# Altium PCB PCB1.PcbDoc (part 2 of 2)
Units mm, origin at the board's own origin, x right, y up, seen from the top; angles counter-clockwise.
Board outline 99.95 x 91.57 mm, 2 copper layers (Top Layer, Bottom Layer); 184 components, 220 nets, 819 pads, 143 vias.
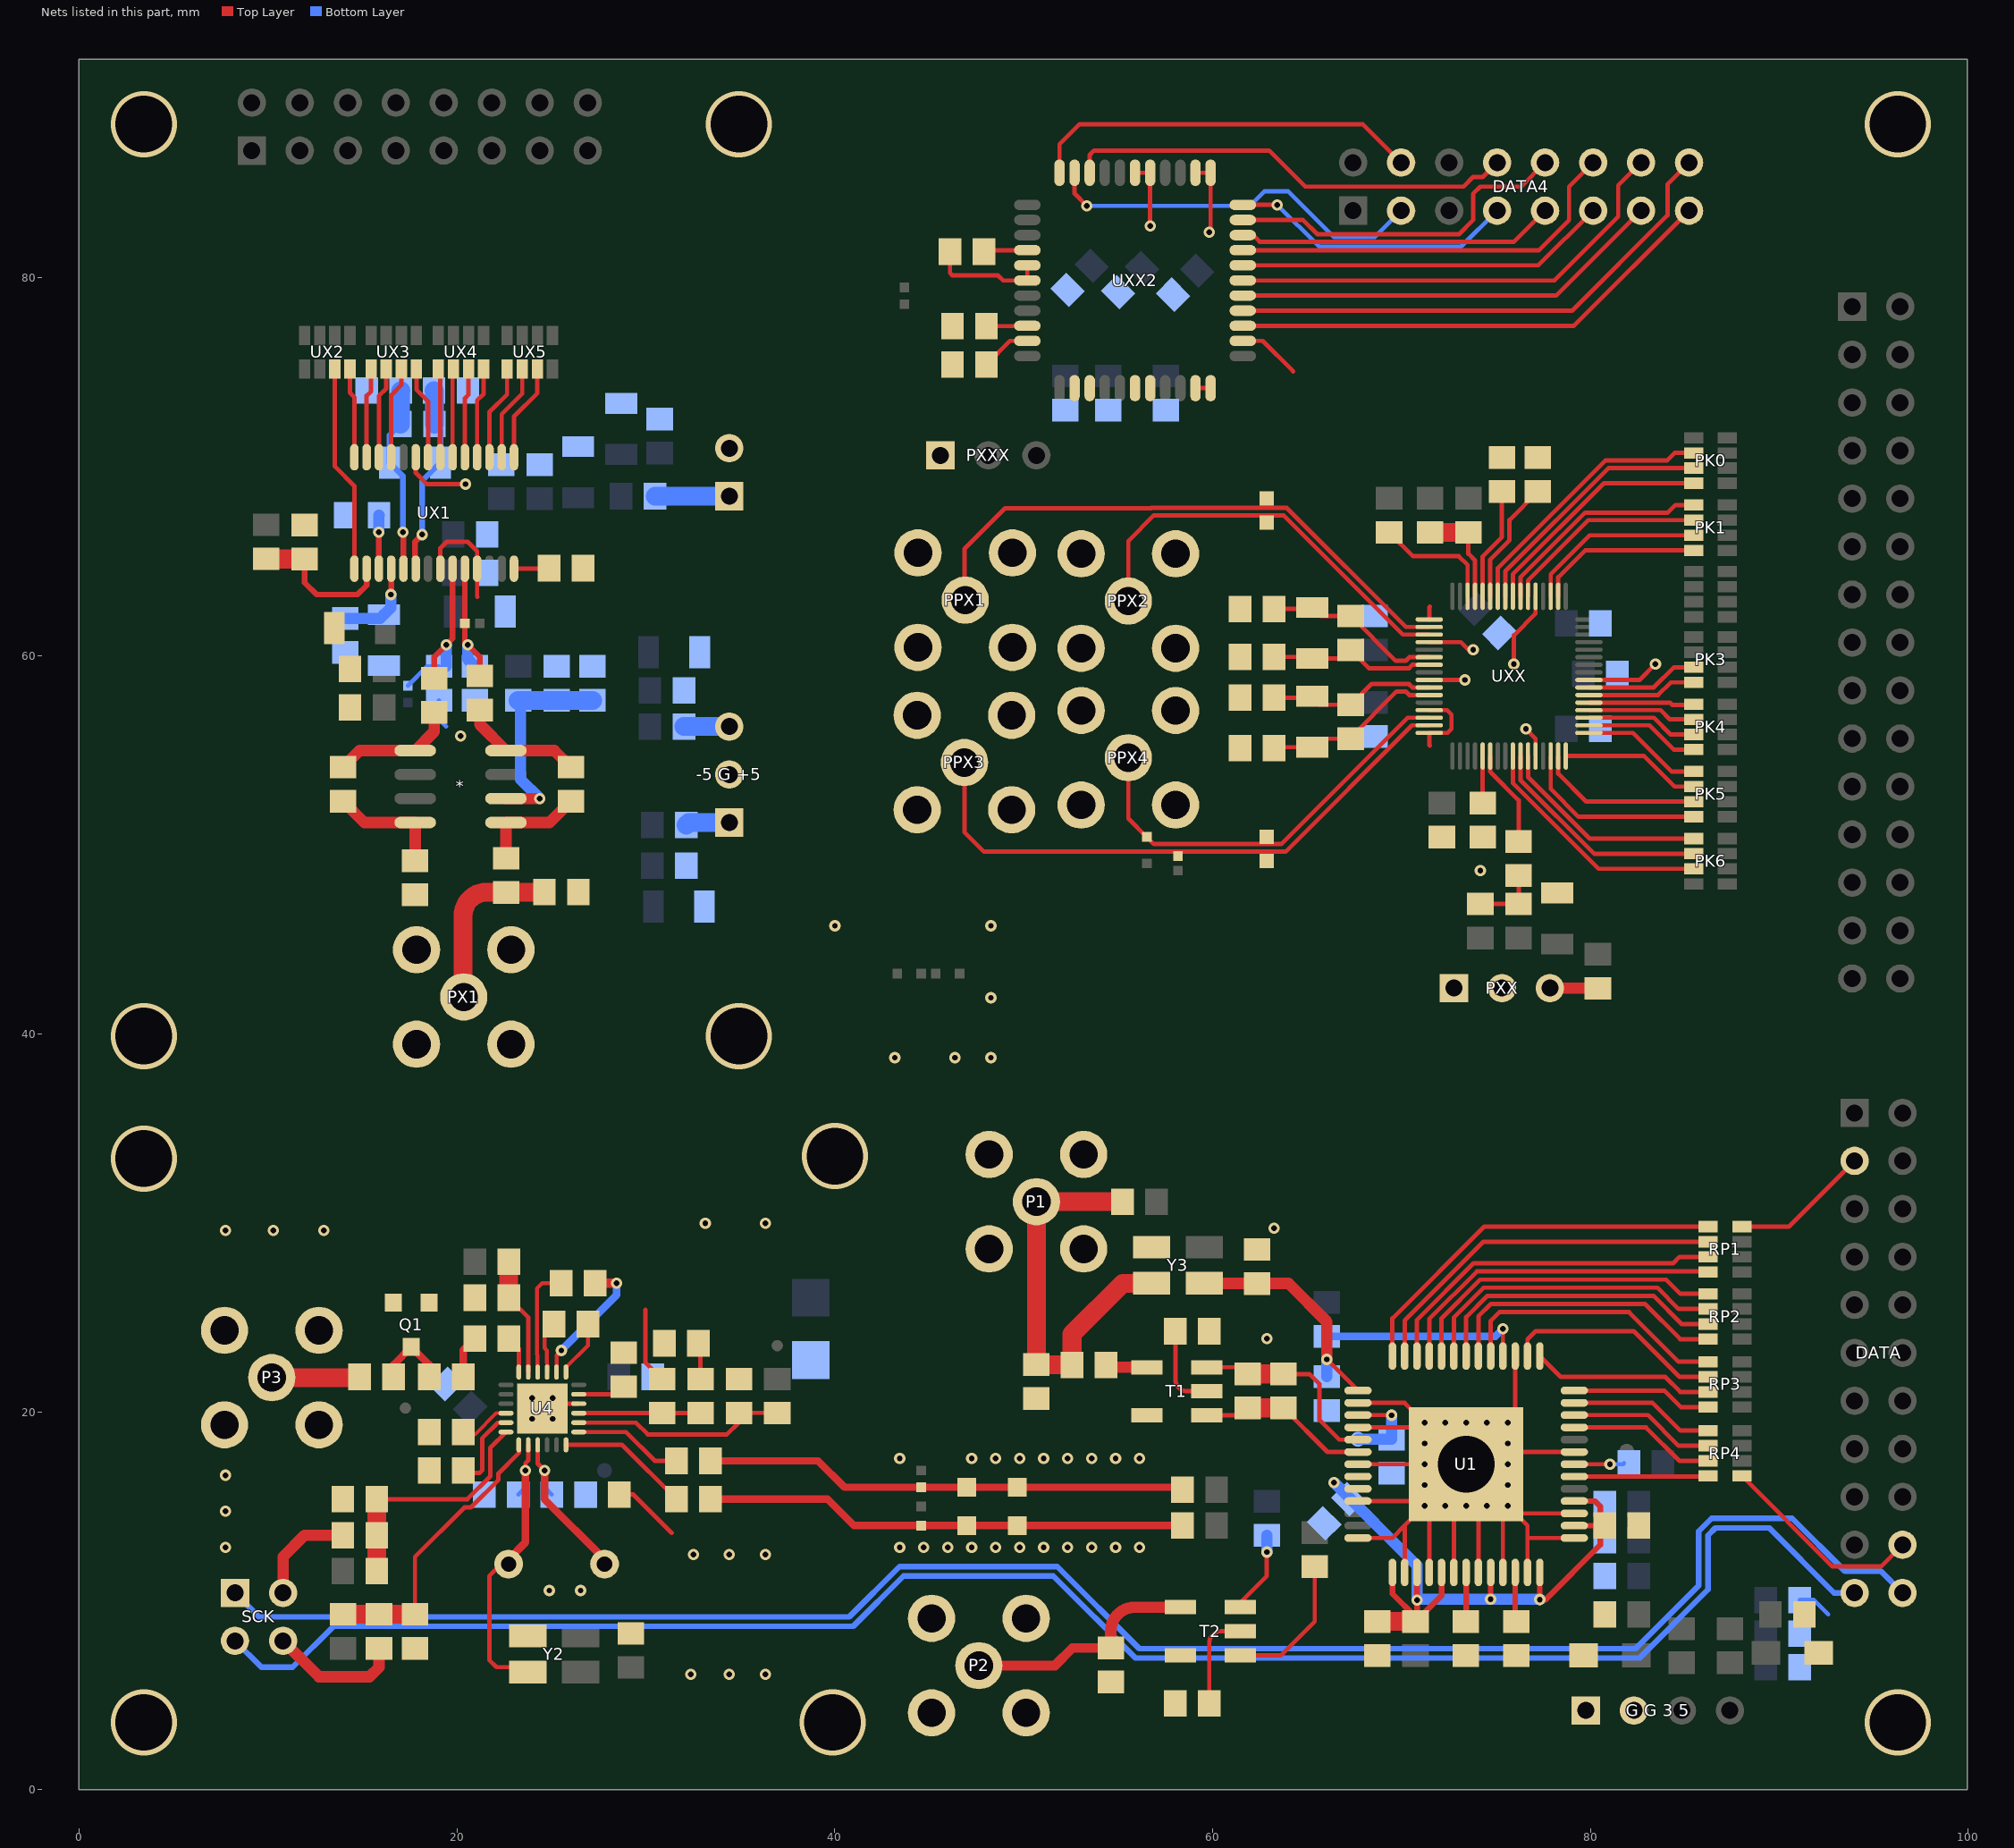
[diagram p2: the nets of this part, all layers, seen from the top]

## Via types
v1: diameter 0.6, hole 0.3, Top Layer to Bottom Layer, 111 vias
v2: diameter 0.5, hole 0.3, Top Layer to Bottom Layer, 20 vias
v3: diameter 3.5, hole 3, Top Layer to Bottom Layer, 11 vias
v4: diameter 1, hole 0.4, Top Layer to Bottom Layer, 1 vias

## Nets (pads, with @x,y where several pads share a name; then routed paths per layer and width w, separated by ;. In a path a pad name is that pad's centre, name@x,y a point inside that pad or via, vN(x,y) a via of type N, cw(c..) or ccw(c..) an arc to the next point about the centre after c; other vN are vias at no path point) (continued)
DAXX6: PK1.7 UXX.50 | length 8.8
  Top Layer w0.229: UXX.50@78.292,63.153 78.293,63.154 78.293,64.162 79.714,65.583 PK1.7@85.471,65.583
DAXX7: PK1.5 UXX.51 | length 9.6
  Top Layer w0.229: UXX.51@77.892,63.153 77.893,63.154 77.893,64.326 79.95,66.383 PK1.5@85.471,66.383
DAXX8: PK1.3 UXX.54 | length 10.9
  Top Layer w0.229: UXX.54@76.692,63.153 76.693,63.154 76.693,63.993 79.883,67.183 PK1.3@85.471,67.183
DAXX9: PK1.1 UXX.55 | length 11.8
  Top Layer w0.229: UXX.55@76.293,63.153 76.293,64.157 79.718,67.582 84.092,67.582 84.493,67.983 PK1.1@85.471,67.983
DAXX10: PK0.7 UXX.56 | length 12.7
  Top Layer w0.229: UXX.56@75.892,63.153 75.893,63.154 75.893,64.321 80.711,69.139 PK0.7@85.471,69.139
DAXX11: PK0.5 UXX.57 | length 13.6
  Top Layer w0.229: UXX.57@75.492,63.153 75.493,63.154 75.493,64.485 80.947,69.939 PK0.5@85.471,69.939
DBXX0: PK6.5 UXX.25 | length 12.9
  Top Layer w0.229: UXX.25@75.892,54.703 75.893,54.702 75.893,53.266 80.429,48.73 PK6.5@85.471,48.73
DBXX1: PK6.3 UXX.26 | length 12.1
  Top Layer w0.229: UXX.26@76.292,54.703 76.293,54.702 76.293,53.43 80.193,49.53 PK6.3@85.471,49.53
DBXX2: PK6.1 UXX.27 | length 11.2
  Top Layer w0.229: UXX.27@76.692,54.703 76.693,54.702 76.693,53.594 79.957,50.33 PK6.1@85.471,50.33
DBXX3: PK5.7 UXX.30 | length 9.9
  Top Layer w0.229: UXX.30@77.892,54.703 77.893,54.702 77.893,52.958 79.365,51.486 PK5.7@85.471,51.486
DBXX4: PK5.5 UXX.31 | length 8.7
  Top Layer w0.229: UXX.31@78.292,54.703 78.293,54.702 78.293,53.768 79.775,52.286 PK5.5@85.471,52.286
DBXX5: PK5.3 UXX.32 | length 7.4
  Top Layer w0.229: UXX.32@78.692,54.703 82.838,54.703 84.455,53.086 PK5.3@85.471,53.086
DBXX6: PK5.1 UXX.33 | length 6.4
  Top Layer w0.229: UXX.33@79.917,55.928 82.248,55.928 84.29,53.886 PK5.1@85.471,53.886
DBXX7: PK4.7 UXX.34 | length 6.1
  Top Layer w0.229: UXX.34@79.917,56.328 83.118,56.328 84.404,55.042 PK4.7@85.471,55.042
DBXX8: PK4.5 UXX.35 | length 5.9
  Top Layer w0.229: UXX.35@79.917,56.728 83.353,56.728 84.239,55.842 PK4.5@85.471,55.842
DBXX9: PK4.3 UXX.36 | length 5.8
  Top Layer w0.229: UXX.36@79.917,57.128 83.715,57.128 84.201,56.642 PK4.3@85.471,56.642
DBXX10: PK4.1 UXX.37 | length 5.6
  Top Layer w0.229: UXX.37@79.917,57.528 84.204,57.528 84.328,57.404 85.433,57.404 PK4.1@85.471,57.442
DBXX11: PK3.7 UXX.38 | length 5.8
  Top Layer w0.229: UXX.38@79.917,57.928 83.582,57.928 84.252,58.598 PK3.7@85.471,58.598
DRY: DATA.3 RP1.2 | length 7.4
  Top Layer w0.23: RP1.2@88.011,29.794 90.5,29.794 DATA.3@93.98,33.274
DT0: DATA4.15 UXX2.25 | length 26.1
  Top Layer w0.229: UXX2.25@61.593,77.47 79.121,77.47 DATA4.15@85.217,83.566
DT1: DATA4.16 UXX2.26 | length 27.8
  Top Layer w0.229: UXX2.26@61.593,78.27 79.032,78.27 84.074,83.312 84.074,84.963 DATA4.16@85.217,86.106
DT2: DATA4.13 UXX2.27 | length 22.9
  Top Layer w0.229: UXX2.27@61.593,79.07 78.181,79.07 DATA4.13@82.677,83.566
DT3: DATA4.14 UXX2.28 | length 24.6
  Top Layer w0.229: UXX2.28@61.593,79.87 78.092,79.87 81.471,83.248 81.471,84.9 DATA4.14@82.677,86.106
DT4: DATA4.11 UXX2.29 | length 19.7
  Top Layer w0.229: UXX2.29@61.593,80.67 77.241,80.67 DATA4.11@80.137,83.566
DT5: DATA4.12 UXX2.30 | length 21.5
  Top Layer w0.229: UXX2.30@61.593,81.47 77.279,81.47 78.867,83.058 78.867,84.836 DATA4.12@80.137,86.106
DT6: DATA4.9 UXX2.31 | length 16.8
  Top Layer w0.229: UXX2.31@61.593,82.27 62.129,82.27 62.484,81.915 75.946,81.915 DATA4.9@77.597,83.566
DT7: DATA4.10 UXX2.32 | length 18.7
  Top Layer w0.229: UXX2.32@61.593,83.07 64.782,83.07 65.538,82.314 73.043,82.314 73.787,83.058 73.787,84.455 74.168,84.836 76.327,84.836 DATA4.10@77.597,86.106
DT8: DATA4.7 UXX2.33 | length 15.2
  Top Layer w0.229: UXX2.33@61.593,83.87 v1(63.423,83.87)
  Bottom Layer w0.229: v1(63.423,83.87) 65.632,81.661 73.152,81.661 DATA4.7@75.057,83.566
DT9: DATA4.8 UXX2.42 | length 23.9
  Top Layer w0.229: UXX2.42@53.493,85.57 53.493,86.513 53.721,86.741 62.992,86.741 64.897,84.836 73.279,84.836 73.787,85.344 74.295,85.344 DATA4.8@75.057,86.106
DT10: DATA4.3 UXX2.43 | length 20.5
  Top Layer w0.229: UXX2.43@52.693,85.57 52.693,84.467 v1(53.34,83.82)
  Bottom Layer w0.229: v1(53.34,83.82) 61.976,83.82 62.738,84.582 64.008,84.582 66.421,82.169 68.58,82.169 DATA4.3@69.977,83.566
DT11: DATA4.4 UXX2.44 | length 20.9
  Top Layer w0.229: UXX2.44@51.893,85.57 51.893,87.072 52.959,88.138 67.945,88.138 DATA4.4@69.977,86.106
DX0: UX1.15 UX5.5 | length 5.2
  Top Layer w0.23: UX1.15@23.021,70.514 23.021,72.678 24.257,73.914 UX5.5@24.257,75.184
DX1: UX1.16 UX5.3 | length 5.1
  Top Layer w0.23: UX1.16@22.371,70.514 22.371,72.79 23.457,73.876 UX5.3@23.457,75.184
DX2: UX1.17 UX5.1 | length 5.1
  Top Layer w0.23: UX1.17@21.721,70.514 21.721,72.902 22.657,73.838 UX5.1@22.657,75.184
DX3: UX1.18 UX4.7 | length 4.8
  Top Layer w0.23: UX1.18@21.071,70.514 21.071,73.522 21.412,73.863 UX4.7@21.412,75.184
DX4: UX1.19 UX4.5 | length 4.7
  Top Layer w0.23: UX1.19@20.421,70.514 20.421,73.634 20.612,73.825 UX4.5@20.612,75.184
DX5: UX1.20 UX4.3 | length 4.7
  Top Layer w0.23: UX1.20@19.771,70.514 19.771,75.143 UX4.3@19.812,75.184
DX6: UX1.21 UX4.1 | length 4.7
  Top Layer w0.23: UX4.1@19.012,75.184 19.121,75.075 UX1.21@19.121,70.514
DX7: UX1.22 UX3.7 | length 4.9
  Top Layer w0.23: UX3.7@17.856,75.184 17.856,74.092 18.471,73.477 UX1.22@18.471,70.514
DX8: UX1.25 UX3.5 | length 4.9
  Top Layer w0.23: UX1.25@16.521,70.514 16.521,73.798 17.056,74.333 UX3.5@17.056,75.184
DX9: UX1.26 UX3.3 | length 4.8
  Top Layer w0.23: UX1.26@15.871,70.514 15.871,73.756 16.256,74.141 UX3.3@16.256,75.184
DX10: UX1.27 UX3.1 | length 4.8
  Top Layer w0.23: UX1.27@15.221,70.514 15.221,73.768 15.456,74.003 UX3.1@15.456,75.184
DX11: UX1.28 UX2.7 | length 4.8
  Top Layer w0.23: UX2.7@14.338,75.184 14.338,73.927 14.571,73.694 UX1.28@14.571,70.514
GND: "3 G.2" "-5 G +5.2" "G G 3 5.1" "G G 3 5.2" C1.1 C2.1 C3.1 C4.1 C5.1 C6.1 C7.1 C8.1 C9.1 C10.1 C11.1 C12.1 C13.1 C14.2 C16.1 C17.2 C18.2 C19.2 C20.2 C21.2 C22.2 C23.2 C24.2 C27.2 C28.1 C29.1 C30.1 C31.1 C32.1 C33.1 C34.1 C35.1 C38.2 C39.2 C40.1 CC22.1 CC23.1 CC24.1 CC25.1 CX3.2 CX4.1 CX5.1 CX6.1 CX7.1 CX8.1 CX9.1 CX10.1 CX11.2 CX12.2 CX13.2 CX14.2 CX15.2 CX16.1 CX17.1 CX18.1 CX20.1 CX21.1 CX22.2 CX23.2 CX24.2 CX26.2 CX30.1 CX31.1 CX37.2 CX38.1 CX39.2 CX40.2 CX41.1 CX42.2 CX43.2 CX44.2 CX45.1 CX46.1 CX47.1 CX48.1 CX49.1 CX50.1 CX51.1 CX52.1 CX53.1 P1.2 P2.2 P3.2 pad.85 PPX1.2 PPX2.2 PPX3.2 PPX4.2 PX1.2 PXX.1 PXX.2 PXXX.1 Q1.1 Q1.2 R2.1 R5.1 RR11.2 RR12.1 RR13.2 RX1.1 RX2.2 RX3.1 RX5.1 RX7.1 RX10.1 RX13.2 T1.2 T2.2 U1.2 U1.4 U1.7 U1.10 U1.13 U1.15 U1.17 U1.19 U1.21 U1.23 U1.25 U1.27 U1.29 U1.34 U1.42 U1.53 U4.16 U4.25 UX1.8 UX1.11 UX1.23 UXX2.5 UXX2.6 UXX2.13 UXX2.14 UXX2.17 UXX2.18 UXX2.21 UXX2.22 UXX2.24 UXX2.34 UXX2.35 UXX2.38 UXX2.39 UXX.1 UXX.4 UXX.9 UXX.13 UXX.16 UXX.28 UXX.40 UXX.53 Y2.2 Y3.2 | length 134.5
  Top Layer w0.229: C27.2@28.586,15.621 29.337,15.621 31.369,13.589 ; 29.972,25.4 29.972,22.617 C21.2@30.861,21.728 ; CX47.1@46.103,81.394 46.101,81.392 46.101,80.264 46.228,80.137 48.641,80.137 48.908,79.87 UXX2.6@50.193,79.87 UXX2.5@50.193,80.67 ; UXX2.39@55.893,85.57 UXX2.38@56.693,85.57 v1(56.693,82.758) ; UXX2.21@59.093,74.17 UXX2.22@59.893,74.17 ; UXX2.35@59.093,85.57 UXX2.34@59.893,85.57 59.893,82.499 v1(59.817,82.423) ; UXX2.24@61.593,76.67 62.649,76.67 64.262,75.057 ; UXX.13@71.467,57.128 72.412,57.128 72.644,56.896 72.644,56.134 72.438,55.928 UXX.16@71.467,55.928 71.467,55.279 71.501,55.245 ; UXX.9@71.467,58.728 v1(73.352,58.728) ; UXX.4@71.467,60.728 73.13,60.728 73.533,60.325 v1(73.787,60.325) ; UXX.1@71.467,61.928 71.467,62.577 71.501,62.611 ; v1(75.946,59.563) 75.946,61.087 77.092,62.233 UXX.53@77.092,63.153 ; v1(76.581,56.134) 77.092,55.623 UXX.28@77.092,54.703 ; UXX.40@79.917,58.728 82.604,58.728 v1(83.439,59.563)
  Top Layer w0.23: UX1.23@17.821,70.514 17.821,69.682 18.415,69.088 v1(20.447,69.088) ; UX1.8@19.121,64.614 19.121,65.707 19.454,66.04 20.574,66.04 21.071,65.543 UX1.11@21.071,64.614 21.071,63.13 21.082,63.119 ; U4.25@24.523,20.173 24.773,20.423 U4.16@26.448,20.423 ; U1.13@67.691,13.32 69.516,13.32 70.166,13.97 ; U1.10@67.691,15.27 U1.53@71.466,15.27 ; U1.7@67.691,17.22 v2(71.216,17.22) v3(73.416,17.22) ; U1.4@67.691,19.17 U1.53@71.216,19.17 ; U1.2@67.691,20.47 70.166,20.47 v2(71.216,19.42) v3(73.416,17.22) ; U1.15@70.166,11.495 70.166,13.97 ; U1.53@71.388,15.192 v2(71.216,15.02) 70.166,13.97 ; U1.17@71.466,11.495 U1.53@71.466,15.27 ; U1.19@72.766,11.495 U1.53@72.766,16.57 ; U1.21@74.066,11.495 U1.53@74.066,16.57 ; CX42.2@74.168,46.874 CX43.2@76.2,46.874 RR12.1@76.2,48.376 ; U1.23@75.366,11.495 U1.53@75.366,15.02 ; U1.42@76.016,22.945 76.016,19.82 v2(75.616,19.42) U1.53@74.066,17.87 ; U1.25@76.666,11.495 76.666,13.335 ; U1.27@79.141,13.32 76.681,13.32 76.666,13.335 ; U1.29@79.141,14.62 U1.53@76.016,14.62 ; U1.34@79.141,17.87 U1.53@74.066,17.87 ; U1.53@71.466,15.27 U1.53@72.766,16.57 ; U1.53@72.766,16.57 v3(73.416,17.22) ; v3(73.416,17.22) U1.53@74.066,17.87 ; v3(73.416,17.22) U1.53@74.066,16.57 ; U1.53@74.066,16.57 v2(75.616,15.02) U1.53@76.016,14.62 ; U1.53@76.016,14.62 76.666,13.97 76.666,13.335
  Bottom Layer w0.229: CX18.1@19.05,57.647 19.05,56.642 19.431,56.261 ; C12.1@91.07,10.033 91.821,10.033 92.583,9.271
  other v1: 32.385,6.096 34.417,6.096 36.322,6.096 24.892,10.541 26.543,10.541 32.512,12.446 34.417,12.446 36.322,12.446 7.747,12.827 43.434,12.827 44.704,12.827 45.974,12.827 47.244,12.827 48.514,12.827 49.784,12.827 51.054,12.827 52.324,12.827 53.594,12.827 54.864,12.827 56.134,12.827 7.747,14.732 7.747,16.637 43.434,17.526 47.244,17.526 48.514,17.526 49.784,17.526 51.054,17.526 52.324,17.526 53.594,17.526 54.864,17.526 56.134,17.526 62.865,23.876 7.747,29.591 10.287,29.591 12.954,29.591 63.246,29.718 33.147,29.972 36.322,29.972 43.18,38.735 46.355,38.735 48.26,38.735 48.26,41.91 40.005,45.72 48.26,45.72 74.168,48.641 20.193,55.753
  other v2: 72.316,15.02 73.416,15.02 74.516,15.02 71.216,16.12 75.616,16.12 75.616,17.22 71.216,18.32 75.616,18.32 72.316,19.42 73.416,19.42 74.516,19.42 23.973,19.623 25.073,19.623 23.973,20.723 25.073,20.723
  other v3: 3.429,3.556 39.878,3.556 96.266,3.556 3.429,33.401 40.005,33.528 3.429,39.878 34.925,39.878 3.429,88.138 34.925,88.138 96.266,88.138
Net*_1: *.1 RX11.2 RX12.1 | length 5.8
  Top Layer w0.6: RX12.1@22.606,49.287 22.593,49.3 *.1@22.593,51.181 24.903,51.181 RX11.2@26.035,52.313
Net*_2: *.2 CX16.2 RX6.1 RX7.2 | length 11.3
  Top Layer w0.6: *.2@22.593,52.451 v1(24.384,52.451)
  Bottom Layer w0.6: RX6.1@23.357,57.647 23.357,53.478 v1(24.384,52.451)
  Bottom Layer w1: RX6.1@23.241,57.647 23.357,57.647 CX16.2@27.178,57.647
Net*_4: *.4 RX8.2 RX11.1 | length 6.5
  Top Layer w0.6: RX8.2@21.209,57.139 21.209,56.375 *.4@22.593,54.991 25.157,54.991 RX11.1@26.035,54.113
Net*_5: *.5 RR10.1 RX9.2 | length 6.6
  Top Layer w0.6: RR10.1@13.97,54.113 14.848,54.991 *.5@17.793,54.991 18.796,55.994 RX9.2@18.796,57.012
Net*_8: *.8 RR10.2 RR13.1 | length 6.3
  Top Layer w0.6: RR10.2@13.97,52.313 15.102,51.181 *.8@17.793,51.181 17.793,49.173 RR13.1@17.78,49.16
NetC1_2: C1.2 U1.20 | length 2.6
  Top Layer w0.3: C1.2@73.406,8.901 73.416,8.911 U1.20@73.416,11.495
NetC2_2: C2.2 U1.24 | length 2.6
  Top Layer w0.3: U1.24@76.016,11.495 76.016,8.958 C2.2@76.073,8.901
NetC13_2: C13.2 T1.4 | length 4.6
  Top Layer w0.229: C13.2@58.028,24.257 58.028,21.717 ccw(c58.663,21.717) 58.663,21.082 T1.4@59.695,21.082
NetC15_1: C15.1 T1.1 | length 2.2
  Top Layer w0.61: C15.1@54.356,22.479 54.483,22.352 T1.1@56.515,22.352
NetC15_2: C15.2 P1.1 R2.2 Rx.1 Y3.3 | length 22
  Top Layer w1: Rx.1@55.234,31.115 P1.1@50.673,31.115 R2.2@50.673,22.49 50.684,22.479 C15.2@52.556,22.479 52.556,24.108 55.245,26.797 Y3.3@56.769,26.797
NetC16_2: C16.2 T2.4 | length 5.2
  Top Layer w0.229: C16.2@59.828,4.572 59.817,4.583 59.817,7.747 cw(c60.452,7.747) 60.452,8.382
  Top Layer w0.23: 60.452,8.382 T2.4@61.473,8.382
NetC17_1: C17.1 C38.1 C39.1 F4.2 U1.8 U1.9 U1.14 U1.16 U1.18 U1.22 U1.26 U1.28 U1.30 | length 37.5
  Top Layer w0.3: U1.14@69.516,11.495 69.516,10.367 70.739,9.144 F4.2@70.739,8.901 F4.2@70.816,8.978 ; U1.16@70.816,11.495 v1(70.816,10.033) F4.2@70.816,8.978 ; U1.18@72.116,11.495 72.116,10.278 F4.2@70.816,8.978 ; v1(74.716,10.073) U1.22@74.716,11.495 ; U1.26@77.316,11.495 v1(77.316,10.06) 77.624,10.06 80.518,12.954 C39.1@80.518,13.97 ; U1.28@79.141,13.97 C39.1@80.518,13.97 ; U1.30@79.141,15.27 80.234,15.27 80.518,14.986 C39.1@80.518,13.97
  Top Layer w1: C17.1@68.707,8.901 F4.2@70.739,8.901
  Bottom Layer w0.6: v1(66.421,16.256) 70.816,11.861 v1(70.816,10.033) 70.856,10.073 v1(74.716,10.073) 77.303,10.073 v1(77.316,10.06)
NetC18_1: C18.1 C40.2 F3.1 U1.1 U1.43 Y3.4 | length 24.9
  Top Layer w0.23: v1(66.04,22.771) U1.1@67.691,21.12 ; U1.43@75.366,22.945 v1(75.366,24.384) v1@75.366,24.566
  Top Layer w0.61: Y3.4@59.563,26.797 62.346,26.797 C40.2@62.357,26.786 64.019,26.786 66.04,24.765 v1(66.04,22.771)
  Bottom Layer w0.4: v1(66.04,22.771) F3.1@66.04,23.992 74.974,23.992 v1(75.366,24.384)
  Bottom Layer w0.6: C18.1@66.04,21.855 v1(66.04,22.771)
NetC20_1: C20.1 U4.17 | length 2.5
  Top Layer w0.23: U4.17@26.448,20.923 28.427,20.923 C20.1@28.829,21.325
NetC21_1: C21.1 R7.1 U4.15 | length 6.4
  Top Layer w0.23: U4.15@26.448,19.923 30.856,19.923 C21.1@30.861,19.928 R7.1@32.893,19.928
NetC22_1: C22.1 R7.2 | length 1.9
  Top Layer w0.23: C22.1@32.777,23.622 32.893,23.506 R7.2@32.893,21.728
NetC23_1: C23.1 R6.1 U4.14 | length 11.5
  Top Layer w0.23: U4.14@26.448,19.423 29.472,19.423 30.099,18.796 34.29,18.796 34.925,19.431 C23.1@34.925,19.928 ; C23.1@34.925,19.939 R6.1@36.957,19.939
NetC24_1: C24.1 F6.2 U4.23 | length 6.3
  Top Layer w0.23: C24.1@22.744,26.035 23.773,25.006 U4.23@23.773,22.098
  Top Layer w1: C24.1@22.744,26.035 F6.2@22.744,27.94
NetC25_1: C25.1 P3.1 | length 4.7
  Top Layer w1: P3.1@10.2,21.804 14.808,21.804 C25.1@14.848,21.844
NetC25_2: C25.2 C26.1 Q1.3 | length 4
  Top Layer w0.4: C25.2@16.648,21.844 16.648,22.492 Q1.3@17.587,23.431 18.531,22.487 C26.1@18.531,21.844
NetC26_2: C26.2 L3.1 | length 2.3
  Top Layer w0.4: C26.2@20.331,21.844 20.331,23.263 L3.1@20.944,23.876
NetC29_2: C29.2 U4.4 | length 2.7
  Top Layer w0.2: C29.2@20.331,18.796 20.955,18.796 22.082,19.923 U4.4@22.598,19.923
NetC30_2: C30.2 U4.5 | length 4.4
  Top Layer w0.23: C30.2@20.331,16.764 21.209,16.764 21.336,16.891 21.336,18.59 22.169,19.423 U4.5@22.598,19.423
NetC31_2: C31.2 R10.1 R12.1 U4.6 | length 13
  Top Layer w0.23: C31.2@15.759,15.367 20.552,15.367 21.766,16.581 21.766,18.091 U4.6@22.598,18.923
  Top Layer w1: R10.1@15.759,11.557 C31.2@15.759,15.367
NetC32_2: C32.2 R11.1 R13.1 U4.7 | length 15.2
  Top Layer w0.23: C32.2@17.78,9.282 17.78,12.319 20.398,14.937 20.731,14.937 22.196,16.402 22.196,16.735 23.273,17.812 U4.7@23.273,18.248
  Top Layer w1: R11.1@13.97,9.282 C32.2@17.78,9.282
NetC33_2: C33.2 U4.8 Y1.2 Y2.3 | length 16
  Top Layer w0.23: Y1.2@22.733,12.319 21.717,11.303 21.717,6.858 22.098,6.477 Y2.3@23.749,6.477 ; v1(23.622,16.891) 23.622,17.272 23.773,17.423 U4.8@23.773,18.248
  Top Layer w0.4: Y1.2@22.733,12.192 23.622,13.081 v1(23.622,16.891)
  Bottom Layer w0.23: C33.2@23.252,15.621 23.622,15.991 v1(23.622,16.891)
NetC34_2: C34.2 U4.9 Y1.1 | length 9
  Top Layer w0.23: U4.9@24.273,18.248 24.273,17.256 v1(24.638,16.891)
  Top Layer w0.4: v1(24.638,16.891) 24.638,15.367 Y1.1@27.813,12.192
  Bottom Layer w0.23: v1(24.638,16.891) 24.638,16.002 C34.2@25.019,15.621
NetC36_2: C36.2 pad.7@46.99,16.002 pad.7@49.657,16.002 pad.31 R8.2 | length 25.6
  Top Layer w0.4: R8.2@33.412,17.399 39.116,17.399 40.513,16.002 58.282,16.002 C36.2@58.409,15.875
NetC37_2: C37.2 pad.7@46.99,13.97 pad.8 pad.32 R9.2 | length 25.6
  Top Layer w0.4: R9.2@33.412,15.367 39.624,15.367 41.021,13.97 C37.2@58.409,13.97
NetCX1_1: CX1.1 CX2.1 CX4.2 UX1.6 | length 10.1
  Top Layer w0.3: UX1.6@17.821,64.614 17.78,64.655 17.78,66.04 v1(18.161,66.421)
  Bottom Layer w0.3: v1(18.161,66.421) 18.161,69.262 CX1.1@19.13,70.231 19.13,71.94 CX2.1@18.807,72.263
  Bottom Layer w1: CX4.2@18.785,74.041 18.807,74.019 CX2.1@18.807,72.263
NetCX1_2: CX1.2 CX2.2 CX3.1 UX1.5 | length 9.9
  Top Layer w0.3: UX1.5@17.171,64.614 v1@17.171,66.522
  Bottom Layer w0.3: CX2.2@17.007,72.263 16.43,71.686 CX1.2@16.43,70.231 17.145,69.516 v1(17.145,66.548)
  Bottom Layer w1: CX2.2@17.007,72.263 17.007,74.019 CX3.1@17.029,74.041
NetCX14_1: CX14.1 CX15.1 UX1.4 | length 4.7
  Top Layer w0.3: v1(16.51,63.246) 16.521,63.257 UX1.4@16.521,64.614
  Bottom Layer w0.6: CX14.1@14.097,61.987 15.933,61.987 CX15.1@16.129,62.183 16.51,62.564 v1(16.51,63.246)
NetCX17_2: CX17.2 pad.37 RX8.1 UX1.10 | length 7.4
  Top Layer w0.3: UX1.10@20.421,64.614 pad.37@20.421,61.722 20.421,60.732 v1(20.574,60.579) 21.209,59.944 RX8.1@21.209,58.939 RX8.1@21.209,58.812
  Bottom Layer w0.6: v1(20.574,60.579) 20.574,59.828 CX17.2@20.955,59.447
NetCX18_2: CX18.2 pad.38 RX9.1 UX1.9 | length 9.4
  Top Layer w0.3: RX9.1@18.796,58.812 18.796,59.944 v1(19.431,60.579) 19.771,60.919 UX1.9@19.771,64.614
  Bottom Layer w0.229: pad.38@17.399,58.42 18.426,59.447 CX18.2@19.05,59.447
  Bottom Layer w0.6: CX18.2@19.431,59.447 v1(19.431,60.579)
NetCX24_1: CX24.1 CX25.2 CX27.2 UXX.7 | length 8.9
  Top Layer w0.229: CX24.1@63.257,59.944 65.198,59.944 CX27.2@65.278,59.864 66.86,59.864 CX25.2@67.31,60.314 68.282,59.342 70.384,59.342 70.571,59.528 UXX.7@71.467,59.528
NetCX25_1: CX25.1 CX26.1 CX27.1 UXX.6 | length 9.5
  Top Layer w0.229: CX26.1@63.257,62.484 65.198,62.484 CX27.1@65.278,62.564 65.728,62.114 CX25.1@67.31,62.114 69.683,59.741 70.219,59.741 70.407,59.928 UXX.6@71.467,59.928
NetCX28_1: CX28.1 CX29.1 CX31.2 UXX.10 | length 8.9
  Top Layer w0.229: CX31.2@63.257,57.785 65.198,57.785 65.568,57.415 CX29.1@67.31,57.415 68.409,58.514 70.384,58.514 70.571,58.328 UXX.10@71.467,58.328
NetCX28_2: CX28.2 CX29.2 CX30.2 UXX.11 | length 9.6
  Top Layer w0.229: CX30.2@63.257,55.118 63.304,55.165 CX28.2@65.278,55.165 65.728,55.615 CX29.2@67.31,55.615 67.31,55.691 69.735,58.115 70.219,58.115 70.407,57.928 UXX.11@71.467,57.928
NetCX45_2: CX45.2 UXX2.9 | length 2.2
  Top Layer w0.229: CX45.2@48.03,77.457 50.18,77.457 UXX2.9@50.193,77.47
NetCX46_2: CX46.2 UXX2.10 | length 2.7
  Top Layer w0.229: CX46.2@48.03,75.425 49.275,76.67 UXX2.10@50.193,76.67
NetCX47_2: CX47.2 UXX2.4 | length 2.3
  Top Layer w0.229: CX47.2@47.903,81.394 47.979,81.47 UXX2.4@50.193,81.47
NetD1_1: D1.1 D2.2 T1.3 U1.5 | length 10.7
  Top Layer w0.229: T1.3@59.695,22.352 61.49,22.352 D2.2@61.849,21.993
  Top Layer w0.23: D1.1@63.754,21.993 65.129,21.993 65.659,21.463 65.659,19.558 66.697,18.52 U1.5@67.691,18.52
  Top Layer w1.016: D2.2@61.849,21.993 D1.1@63.754,21.993
NetD1_2: D1.2 D2.1 T1.5 U1.6 | length 9.1
  Top Layer w0.229: T1.5@59.695,19.812 61.468,19.812 D2.1@61.849,20.193
  Top Layer w0.23: D1.2@63.754,20.193 66.077,17.87 U1.6@67.691,17.87
  Top Layer w1.016: D2.1@61.849,20.193 D1.2@63.754,20.193
NetF5_1: F5.1 U1.33 | length 2.7
  Top Layer w0.23: U1.33@79.141,17.22 v1(81.026,17.22)
  Bottom Layer w0.23: v1(81.026,17.22) 81.725,17.22 F5.1@81.777,17.272
NetFX1_2: "3 G.1" FX1.2 | length 3.9
  Bottom Layer w1: FX1.2@30.491,68.453 34.417,68.453
NetFX2_1: "-5 G +5.3" FX2.1 | length 2.4
  Bottom Layer w1: FX2.1@32.015,56.261 34.417,56.261
NetFX3_2: "-5 G +5.1" FX3.2 | length 2.3
  Bottom Layer w1: FX3.2@32.142,51.054 32.269,51.181 34.417,51.181
NetFXX1_2: FXX1.2 PXX.3 | length 2.7
  Top Layer w0.61: PXX.3@77.851,42.418 FXX1.2@80.507,42.418
NetIIC_2: R12.2 SCK.2 | length 5.5
  Top Layer w0.6: SCK.2@10.795,10.414 10.795,12.319 11.938,13.462 R12.2@13.959,13.462
NetIIC_4: R13.2 SCK.4 | length 7.1
  Top Layer w0.6: SCK.4@10.795,7.874 12.7,5.969 15.367,5.969 15.875,6.477 R13.2@15.875,7.482
NetL1_1: L1.1 U4.21 | length 2.8
  Top Layer w0.21: U4.21@24.773,22.098 24.765,22.987 24.765,23.241 24.64,23.366 24.64,24.143 L1.1@25.135,24.638
NetL1_2: L1.2 U4.19 | length 3
  Top Layer w0.2: U4.19@25.773,22.344 26.935,23.506 L1.2@26.935,24.638
  Top Layer w0.21: U4.19@25.773,22.098 U4.19@25.773,22.344
NetL2_1: L2.1 U4.22 | length 5.8
  Top Layer w0.21: U4.22@24.273,22.098 24.273,22.987 24.23,23.03 24.23,26.516 24.511,26.797 L2.1@25.516,26.797
NetL2_2: L2.2 U4.20 | length 7.1
  Top Layer w0.21: U4.20@25.273,22.098 25.273,22.987 v1(25.527,23.241)
  Top Layer w0.5: L2.2@27.316,26.797 v1(28.448,26.797)
  Bottom Layer w0.4: v1(25.527,23.241) 25.527,23.254 28.448,26.175 v1(28.448,26.797)
NetL3_2: L3.2 U4.24 | length 2
  Top Layer w0.23: L3.2@22.744,23.876 23.273,23.347 U4.24@23.273,22.098
NetP2_1: P2.1 R5.2 T2.1 | length 12.7
  Top Layer w0.5: P2.1@47.625,6.564 51.649,6.564 52.589,7.504 R5.2@54.61,7.504
  Top Layer w0.61: R5.2@54.61,7.504 54.61,8.382 cw(c55.88,8.382) 55.88,9.652 T2.1@58.293,9.652
NetPPX1_1: pad.15 PPX1.1 UXX.2 | length 31.2
  Top Layer w0.229: PPX1.1@47.117,62.738 PPX1.1@46.903,62.952 46.863,62.992 46.863,65.659 49.022,67.818 56.769,67.818 56.751,67.836 63.919,67.836 70.227,61.528 UXX.2@71.467,61.528
NetPPX2_1: pad.14 PPX2.1 UXX.3 | length 22.3
  Top Layer w0.229: PPX2.1@55.539,62.905 55.539,66.08 56.896,67.437 63.754,67.437 70.062,61.129 71.466,61.129 UXX.3@71.467,61.128
NetPPX3_1: pad.17 pad.26 PPX3.1 UXX.15 | length 31.5
  Top Layer w0.229: PPX3.1@46.863,54.356 46.863,50.673 47.897,49.639 63.863,49.639 70.551,56.327 71.466,56.327 UXX.15@71.467,56.328
NetPPX4_1: pad.16 pad.71 PPX4.1 UXX.14 | length 22.5
  Top Layer w0.229: PPX4.1@55.539,54.61 55.539,51.395 pad.71@56.515,50.419 56.896,50.038 63.627,50.038 70.317,56.728 UXX.14@71.467,56.728
NetPX1_1: PX1.1 RX5.2 RX12.2 | length 9.3
  Top Layer w1: PX1.1@20.36,41.95 20.32,41.99 20.32,46.228 cw(c21.59,46.228) 21.59,47.498 22.595,47.498 RX12.2@22.606,47.487 24.616,47.487 RX5.2@24.627,47.498
NetR3_1: R3.1 T2.3 | length 4.4
  Top Layer w0.23: T2.3@61.473,9.652 61.473,9.911 62.865,11.303 v1(62.865,12.573)
  Bottom Layer w0.6: v1(62.865,12.573) R3.1@62.865,13.451
NetR4_1: R4.1 T2.5 | length 7.6
  Top Layer w0.23: T2.5@61.473,7.112 63.627,7.112 65.405,8.89 R4.1@65.405,11.8
NetR8_1: R8.1 U4.13 | length 5.8
  Top Layer w0.23: U4.13@26.448,18.923 28.956,18.923 30.48,17.399 R8.1@31.612,17.399
NetR9_1: R9.1 U4.12 | length 7
  Top Layer w0.23: U4.12@25.773,18.248 28.731,18.248 R9.1@31.612,15.367
NetRP1_1: RP1.1 U1.52 | length 20.7
  Top Layer w0.23: U1.52@69.516,22.945 69.516,24.939 74.371,29.794 RP1.1@86.233,29.794
NetRP1_3: RP1.3 U1.51 | length 19.7
  Top Layer w0.23: U1.51@70.166,22.945 70.166,24.827 74.333,28.994 RP1.3@86.233,28.994
NetRP1_5: RP1.5 U1.50 | length 18.7
  Top Layer w0.23: U1.50@70.816,22.945 70.816,24.861 73.808,27.853 84.368,27.853 84.709,28.194 RP1.5@86.233,28.194
NetRP1_7: RP1.7 U1.49 | length 17.8
  Top Layer w0.23: U1.49@71.466,22.945 71.466,24.903 73.986,27.423 86.204,27.423 RP1.7@86.233,27.394
NetRP2_1: RP2.1 U1.48 | length 17.3
  Top Layer w0.23: U1.48@72.116,22.945 72.116,24.945 74.164,26.993 84.005,26.993 84.76,26.238 RP2.1@86.233,26.238
NetRP2_3: RP2.3 U1.47 | length 16.6
  Top Layer w0.23: U1.47@72.766,22.945 72.766,24.987 74.342,26.563 83.546,26.563 84.671,25.438 RP2.3@86.233,25.438
NetRP2_5: RP2.5 U1.46 | length 16
  Top Layer w0.23: U1.46@73.416,22.945 73.416,25.029 73.443,25.029 74.547,26.133 83.341,26.133 84.836,24.638 RP2.5@86.233,24.638
NetRP2_7: RP2.7 U1.45 | length 15.3
  Top Layer w0.23: U1.45@74.066,22.945 74.066,25.044 74.725,25.703 82.882,25.703 84.747,23.838 RP2.7@86.233,23.838
NetRP3_1: RP3.1 U1.44 | length 14.7
  Top Layer w0.23: U1.44@74.716,22.945 74.716,24.805 75.184,25.273 82.042,25.273 84.671,22.644 RP3.1@86.233,22.644
NetRP3_3: RP3.3 U1.41 | length 11.6
  Top Layer w0.23: U1.41@76.666,22.945 76.666,23.834 77.089,24.257 82.296,24.257 84.709,21.844 RP3.3@86.233,21.844
NetRP3_5: RP3.5 U1.40 | length 9.7
  Top Layer w0.23: U1.40@77.316,22.945 78.417,21.844 83.947,21.844 84.747,21.044 RP3.5@86.233,21.044
NetRP3_7: RP3.7 U1.39 | length 7.5
  Top Layer w0.23: U1.39@79.141,21.12 83.909,21.12 84.785,20.244 RP3.7@86.233,20.244
NetRP4_1: RP4.1 U1.38 | length 7.7
  Top Layer w0.23: U1.38@79.141,20.47 83.289,20.47 84.76,18.999 RP4.1@86.233,18.999
NetRP4_3: RP4.3 U1.37 | length 7.8
  Top Layer w0.23: U1.37@79.141,19.82 83.05,19.82 84.671,18.199 RP4.3@86.233,18.199
NetRP4_5: RP4.5 U1.36 | length 7.8
  Top Layer w0.23: U1.36@79.141,19.17 82.938,19.17 84.709,17.399 RP4.5@86.233,17.399
NetRP4_7: RP4.7 U1.32 | length 7.1
  Top Layer w0.23: U1.32@79.141,16.57 86.204,16.57 RP4.7@86.233,16.599
NetRR11_1: RR11.1 UXX.60 | length 6
  Top Layer w0.229: UXX.60@74.292,63.153 74.292,65.264
  Top Layer w0.23: 74.292,65.264 75.311,66.283 RR11.1@75.311,68.696
NetRR12_2: RR12.2 UXX.22 | length 5.2
  Top Layer w0.229: UXX.22@74.692,54.086 UXX.22@74.692,54.703 ; 74.73,53.832 76.2,52.362 RR12.2@76.2,50.176
  Top Layer w0.23: UXX.22@74.692,54.086 74.692,53.87 74.73,53.832
NetRX1_2: RX1.2 UX1.14 | length 1.9
  Top Layer w0.23: UX1.14@23.021,64.614 24.852,64.614 RX1.2@24.881,64.643
NetRX2_1: RX2.1 UX1.3 | length 2.8
  Top Layer w0.3: UX1.3@15.871,64.614 v1(15.871,66.544) v1@15.875,66.548
  Bottom Layer w0.6: v1(15.871,66.544) 15.871,67.433 RX2.1@15.875,67.437
NetRX3_2: RX3.2 RX4.1 UX1.2 | length 7.9
  Top Layer w0.3: RX3.2@11.938,65.14 11.938,63.881 12.573,63.246 14.732,63.246 15.221,63.735 UX1.2@15.221,64.614
  Top Layer w1: RX4.1@9.906,65.14 9.917,65.129 RX3.2@11.938,65.129
NetRX10_2: RX10.2 UXX.21 | length 2.5
  Top Layer w0.229: RX10.2@74.292,52.211 UXX.21@74.292,54.703
  Top Layer w0.3: RX10.2@74.292,52.211 RX10.2@74.295,52.208
NetRX13_1: RX13.1 UXX.59 | length 6.6
  Top Layer w0.229: UXX.59@74.692,63.153 74.692,65.099 75.71,66.118 75.71,67.19 RX13.1@77.216,68.696
NetRX14_1: RX14.1 UXX.62 | length 6.5
  Top Layer w0.229: UXX.62@73.492,63.153 73.492,64.811
  Top Layer w0.23: RX14.1@69.342,66.537 70.601,65.278 73.025,65.278 73.492,64.811
NetRX15_1: RX15.1 RX26.1 UXX.61 | length 5.6
  Top Layer w0.229: UXX.61@73.892,63.153 73.892,65.046
  Top Layer w0.23: RX15.1@73.533,66.537 73.533,65.405 73.892,65.046
  Top Layer w1: RX26.1@71.501,66.537 RX15.1@73.533,66.537
OTR: UX1.1 UX2.5 | length 11
  Top Layer w0.23: UX2.5@13.538,75.184 13.538,70.028 14.571,68.995 UX1.1@14.571,64.614
OTR_A: PK0.3 UXX.58 | length 14.4
  Top Layer w0.229: UXX.58@75.092,63.153 75.093,64.649 80.782,70.338 84.054,70.338 84.455,70.739 PK0.3@85.471,70.739
OTR_B: PK3.5 UXX.39 | length 6
  Top Layer w0.229: UXX.39@79.917,58.328 83.347,58.328 84.417,59.398 PK3.5@85.471,59.398
OVR: DATA.20 RP4.8 | length 11
  Top Layer w0.23: RP4.8@88.011,16.599 92.799,11.811 95.377,11.811 DATA.20@96.52,12.954
SCL: DATA.22 SCK.1 | length 97.9
  Bottom Layer w0.3: SCK.1@8.255,10.414 9.525,9.144 40.767,9.144 43.434,11.811 51.774,11.811 56.121,7.464 82.394,7.464 85.725,10.795 85.725,13.669 86.407,14.351 90.678,14.351 93.472,11.557 95.377,11.557 DATA.22@96.52,10.414
SDA: DATA.21 SCK.3 | length 96.1
  Bottom Layer w0.3: SCK.3@8.255,7.874 9.652,6.477 11.303,6.477 13.47,8.644 40.974,8.644 43.641,11.311 51.567,11.311 55.914,6.964 82.601,6.964 86.225,10.588 86.225,13.462 86.614,13.851 89.459,13.851 92.896,10.414 DATA.21@93.98,10.414
VREF: C14.1 pad.11 U1.3 | length 4.8
  Top Layer w0.23: U1.3@67.691,19.82 69.461,19.82 v1(69.469,19.812)
  Bottom Layer w0.6: pad.11@67.691,18.542 67.702,18.553 C14.1@69.469,18.553 v1(69.469,19.812)
pads on no net: *.7 DATA2.5 DATA2.6 DATA3.19 DATA3.20 DATA4.2 DATA4.5 DATA4.6 DATA.2 DATA.9 DATA.10 R6.2 U1.31 U1.35 U4.1 U4.3 U4.10 UX2.1 UX2.2 UX2.3 UX2.4 UXX2.7 UXX2.8 UXX2.23 UXX.8 UXX.23 UXX.24 UXX.42 UXX.43 Y2.1 Y3.1
copper on no net: | length 182
  Top Layer w0.2: 17.272,20.193 21.717,20.193 21.947,20.423 22.598,20.423 ; 24.773,18.248 24.773,17.645 25.378,17.04 25.632,17.04 v1(25.781,16.891)
  Top Layer w0.229: 21.209,61.722 21.209,61.214 39.243,43.18 43.307,43.18 ; 43.561,78.74 48.895,78.74 49.365,78.27 50.193,78.27 ; 43.561,79.375 48.387,79.375 48.623,79.139 50.124,79.139 50.193,79.07 ; 44.577,14.986 v1(45.847,14.986) ; 44.577,16.891 44.577,44.323 48.514,48.26 55.753,48.26 56.515,49.022 ; v1@46.101,19.177 45.339,19.939 45.339,44.196 48.514,47.371 56.896,47.371 58.166,48.641 ; 46.609,43.18 v1(47.371,43.18)
  Top Layer w0.23: 36.957,21.728 36.957,23.495 ; 79.141,18.52 81.302,18.52 81.915,17.907
  Bottom Layer w0.229: 17.399,57.277 22.86,51.816 29.402,51.816 29.624,52.038 29.686,52.038 30.226,52.578 37.973,52.578 v1(47.371,43.18) ; v1(45.847,14.986) 45.974,15.113 v1(45.974,19.304)
  Bottom Layer w0.4: v1(25.781,16.891) 27.813,16.891

## Polygon pours and split planes (outlines as drawn)
GND on Bottom Layer "Top Layer-No Net" (solid, remove dead copper, pour order 48): 0,91.313 99.949,91.313 99.949,0 0,0
GND on Top Layer "Top Layer-No Net" (solid, remove dead copper, pour order 50): 0.127,91.567 99.822,91.567 99.949,91.44 99.949,0.127 0.127,0.127 -0.127,-0.127

## Keep-outs
Keep-Out Layer:
  the board outline again, w0.254

## Other copper
Top Layer:
  rectangle net NetC17_1: 65.913,15.748 68.326,16.764
  pour cut-out: 75.092,54.703 75.092,53.813 87.757,41.148 99.949,41.148 99.949,57.531 75.122,57.531
  pour cut-out: 75.093,64.649 83.566,73.122 83.566,75.311 89.789,81.534 99.949,81.534 99.949,61.722 99.568,62.103 75.057,62.103
  pour cut-out: 13.843,69.469 13.843,74.93 4.826,83.947 4.826,91.567 29.591,91.567 29.591,71.628 23.685,65.722
  pour cut-out: 60.452,75.311 83.566,75.311 87.249,78.994 87.249,91.567 51.308,91.567 51.308,84.455
  pour cut-out: 63.754,30.861 63.754,26.786 64.019,26.786 66.04,24.765 66.04,22.771 67.729,21.082 68.834,21.082 68.834,21.844 77.978,21.844 77.978,16.129 88.265,16.129 93.98,10.414 96.52,10.414 96.52,35.814 68.707,35.814 66.675,33.782 66.675,31.877 66.04,31.877 65.278,31.115
  pour cut-out: 51.308,84.455 51.435,84.582 60.452,84.582 60.452,75.565 60.579,75.438 60.325,75.184 51.181,75.184
  pour cut-out: 72.692,62.055 78.915,62.055 78.994,61.976 78.994,55.626 72.644,55.626 72.517,55.499
  pour cut-out: 68.834,21.844 68.834,12.573 77.978,12.573 77.978,21.844
  pour cut-out: 13.843,69.469 13.843,65.659 23.749,65.659 23.622,65.786 23.622,69.469

## Silkscreen, mask and mechanical layers (free items; w line width, h text height)
Top Overlay:
  lines w0.381: 0,37.465 5.588,37.465 ; 38.989,37.465 45.72,37.465 ; 42.418,0.127 42.418,4.826 ; 42.418,13.208 42.418,17.907 ; 42.418,34.417 42.418,40.386 ; 42.418,86.995 42.418,91.313 ; 90.297,37.465 100.076,37.465
  text "OTR" at 9.906,82.804 h1.14 r90
  text "DX" at 12.446,82.804 h1.14 r90
  text "NC" at 14.986,82.804 h1.14 r90
  text "D8" at 17.653,82.804 h1.14 r90
  text "D6" at 20.066,82.804 h1.14 r90
  text "D4" at 22.352,82.804 h1.14 r90
  text "D2" at 25.146,82.55 h1.14 r90
  text "D0" at 27.813,82.55 h1.14 r90
  text "N" at 72.136,80.391 h1.1
  text "3" at 82.296,80.391 h1.1
  text "1" at 85.09,80.391 h1.1
  text "N" at 66.929,80.264 h1.1
  text "11" at 69.342,80.264 h1.1
  text "9" at 74.549,80.264 h1.1
  text "7" at 77.216,80.264 h1.1
  text "5" at 79.629,80.264 h1.1
  text "NC" at 14.986,79.883 h1.14 r90
  text "D7" at 17.653,79.883 h1.14 r90
  text "D5" at 20.066,79.883 h1.14 r90
  text "D3" at 22.352,79.883 h1.14 r90
  text "D1" at 25.146,79.883 h1.14 r90
  text "D9" at 12.446,79.756 h1.14 r90
  text "CK" at 27.813,79.629 h1.14 r90
  text "+" at 41.91,79.121 h1.14
  text "D11" at 9.906,78.994 h1.14 r90
  text "4" at 79.629,78.359 h1.1
  text "2" at 82.423,78.359 h1.1
  text "0" at 84.963,78.359 h1.1
  text "CK" at 66.421,78.232 h1.1
  text "10" at 69.215,78.232 h1.1
  text "N" at 72.136,78.232 h1.1
  text "8" at 74.549,78.232 h1.1
  text "6" at 77.089,78.232 h1.1
  text "OA" at 86.741,78.105 h1.14
  text "CKA" at 89.154,78.105 h1.14
  text "-" at 41.91,77.851 h1.14
  text "10" at 88.138,75.438 h1.14
  text "11" at 90.297,75.438 h1.14
  text "8" at 89.662,72.771 h1.14
  text "9" at 91.313,72.771 h1.14
  text "6" at 89.662,70.358 h1.14
  text "7" at 91.313,70.358 h1.14
  text "G 3 5" at 52.959,70.104 h1.14
  text "4" at 89.662,67.818 h1.14
  text "5" at 91.313,67.818 h1.14
  text "2" at 89.662,65.151 h1.14
  text "3" at 91.313,65.151 h1.14
  text "0" at 89.662,62.611 h1.14
  text "1" at 91.68,62.611 h1.14
  text "+" at 18.669,62.103 h1.14
  text "-" at 21.082,62.103 h1.14
  text "11" at 88.519,60.071 h1.14
  text "OB" at 90.17,60.071 h1.14
  text "9" at 88.9,57.658 h1.14
  text "10" at 90.297,57.658 h1.14
  text "N" at 89.535,55.372 h1.14
  text "N" at 91.186,55.372 h1.14
  text "7" at 89.535,52.578 h1.14
  text "8" at 91.313,52.578 h1.14
  text "5" at 89.535,49.911 h1.14
  text "6" at 91.313,49.911 h1.14
  text "3" at 89.535,47.498 h1.14
  text "4" at 91.313,47.498 h1.14
  text "1" at 89.789,44.577 h1.14
  text "2" at 91.313,44.577 h1.14
  text "9235 170831" at 4.318,43.053 h1.14 r90
  text "CKB" at 87.503,42.418 h1.14
  text "0" at 91.313,42.418 h1.14
  text "9238 170901" at 53.467,41.529 h1.14
  text "G G 3" at 72.771,39.497 h1.14
  text "CLK" at 85.852,35.306 h1.14
  text "NC" at 90.424,35.306 h1.14
  text "RF 6645 170831" at 6.096,34.036 h1.14
  text "DRY" at 85.852,32.639 h1.14
  text "D13" at 89.408,32.639 h1.14
  text "D12" at 87.122,30.099 h1.14
  text "D11" at 90.424,30.099 h1.14
  text "DX" at 87.757,27.432 h1.14
  text "D9" at 90.424,27.432 h1.14
  text "NC" at 87.757,25.019 h1.14
  text "NC" at 90.424,25.019 h1.14
  text "AGC" at 37.465,24.384 h1.14 r90
  text "D8" at 87.757,22.606 h1.14
  text "D7" at 90.424,22.606 h1.14
  text "D6" at 87.757,19.939 h1.14
  text "D5" at 90.424,19.939 h1.14
  text "D4" at 87.757,17.399 h1.14
  text "D3" at 90.424,17.399 h1.14
  text "- +" at 39.116,15.113 h1.14 r90
  text "D2" at 87.757,14.986 h1.14
  text "D1" at 90.424,14.986 h1.14
  text "D0" at 87.757,12.319 h1.14
  text "OV" at 90.297,12.319 h1.14
  text "SDA" at 0.508,6.35 h1.14
  text "SDA" at 94.615,2.921 h1.14 r90
  text "SCL" at 97.282,2.921 h1.14 r90
Bottom Overlay:
  text "VREF" at 67.056,18.034 h1.1
  text "CLKO" at 33.401,16.383 h1.1
Top Solder:
  lines w2: 38.608,4.318 4.699,4.318 4.699,32.131 38.735,32.131 38.735,20.066 ; 38.608,4.445 38.608,13.589

## Text inside footprints (layer, text, board x,y; h text height)
DATA: Top Overlay "1" at 93.472,38.354 h1.14 r270; Top Overlay "2" at 96.012,38.354 h1.14 r270; Top Overlay "21" at 93.472,8.89 h1.14 r270; Top Overlay "22" at 96.012,8.89 h1.14 r270
DATA2: Top Overlay "16" at 28.448,88.773 h1.14; Top Overlay "15" at 28.448,86.233 h1.14; Top Overlay "1" at 6.604,86.233 h1.14; Top Overlay "2" at 6.604,88.773 h1.14
DATA3: Top Overlay "30" at 95.885,41.402 h1.14 r270; Top Overlay "29" at 93.345,41.402 h1.14 r270; Top Overlay "2" at 95.885,81.026 h1.14 r270; Top Overlay "1" at 93.345,81.026 h1.14 r270
DATA4: Top Overlay "16" at 86.741,85.598 h1.14; Top Overlay "15" at 86.741,83.058 h1.14; Top Overlay "1" at 64.897,83.058 h1.14; Top Overlay "2" at 64.897,85.598 h1.14
SCK: Top Overlay "3" at 7.747,6.35 h1.14 r270; Top Overlay "4" at 10.287,6.35 h1.14 r270; Top Overlay "2" at 10.287,12.954 h1.14 r270; Top Overlay "1" at 7.747,12.446 h1.14 r270